# Altium PCB Board (Processo Seletivo).PcbDoc
Units mil, origin at the board's own origin, x right, y up, seen from the top; angles counter-clockwise.
Board outline 2952.76 x 2952.76 mil, 2 copper layers (Top Layer, Bottom Layer); 46 components, 40 nets, 179 pads, 0 vias.
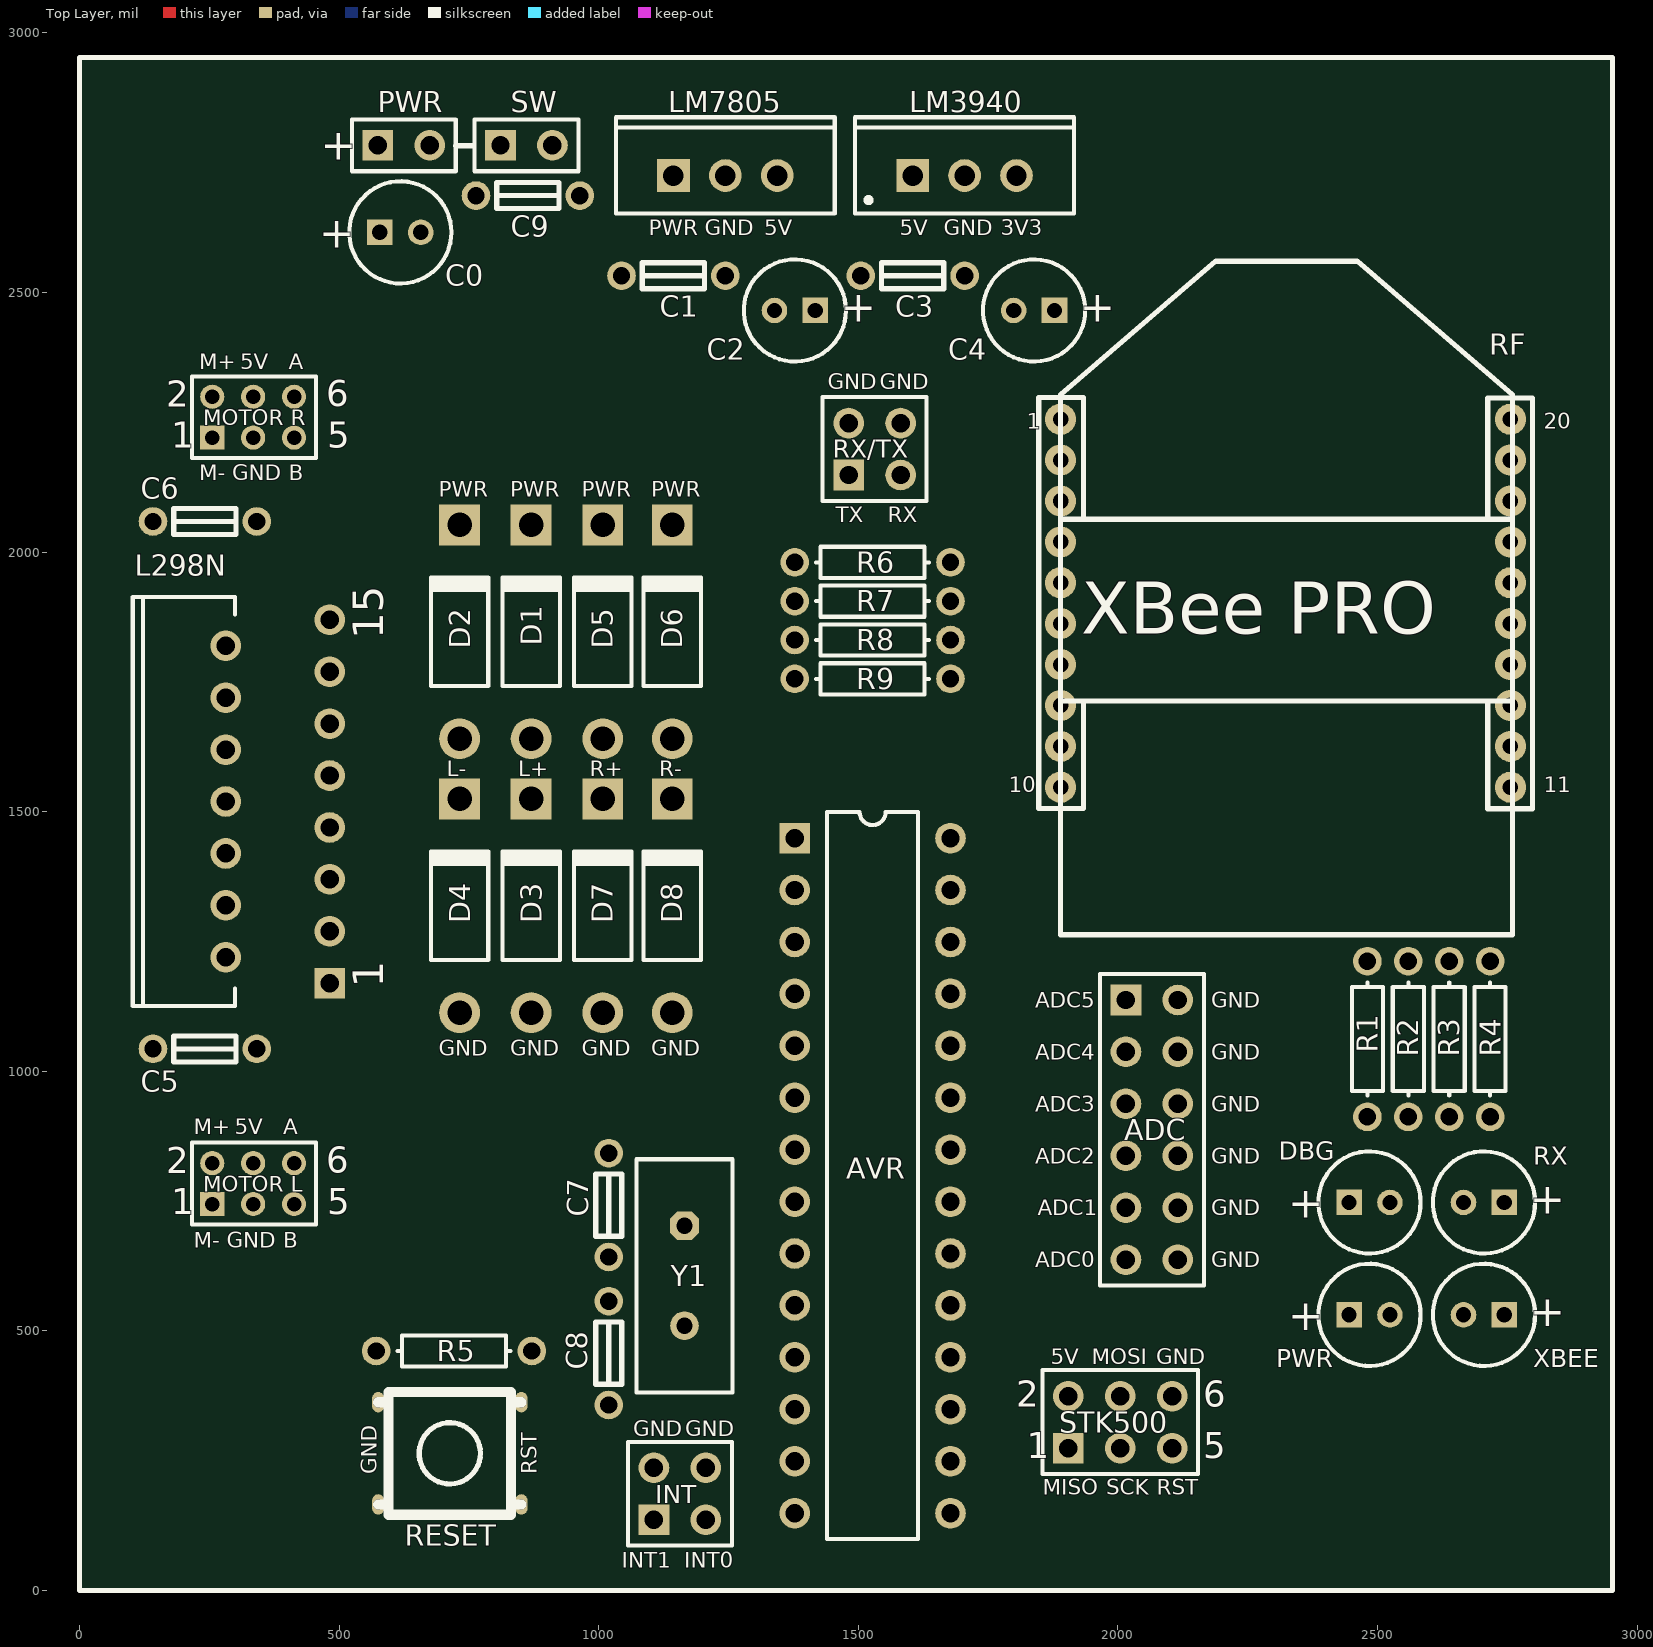
[diagram p0: Top Layer view]
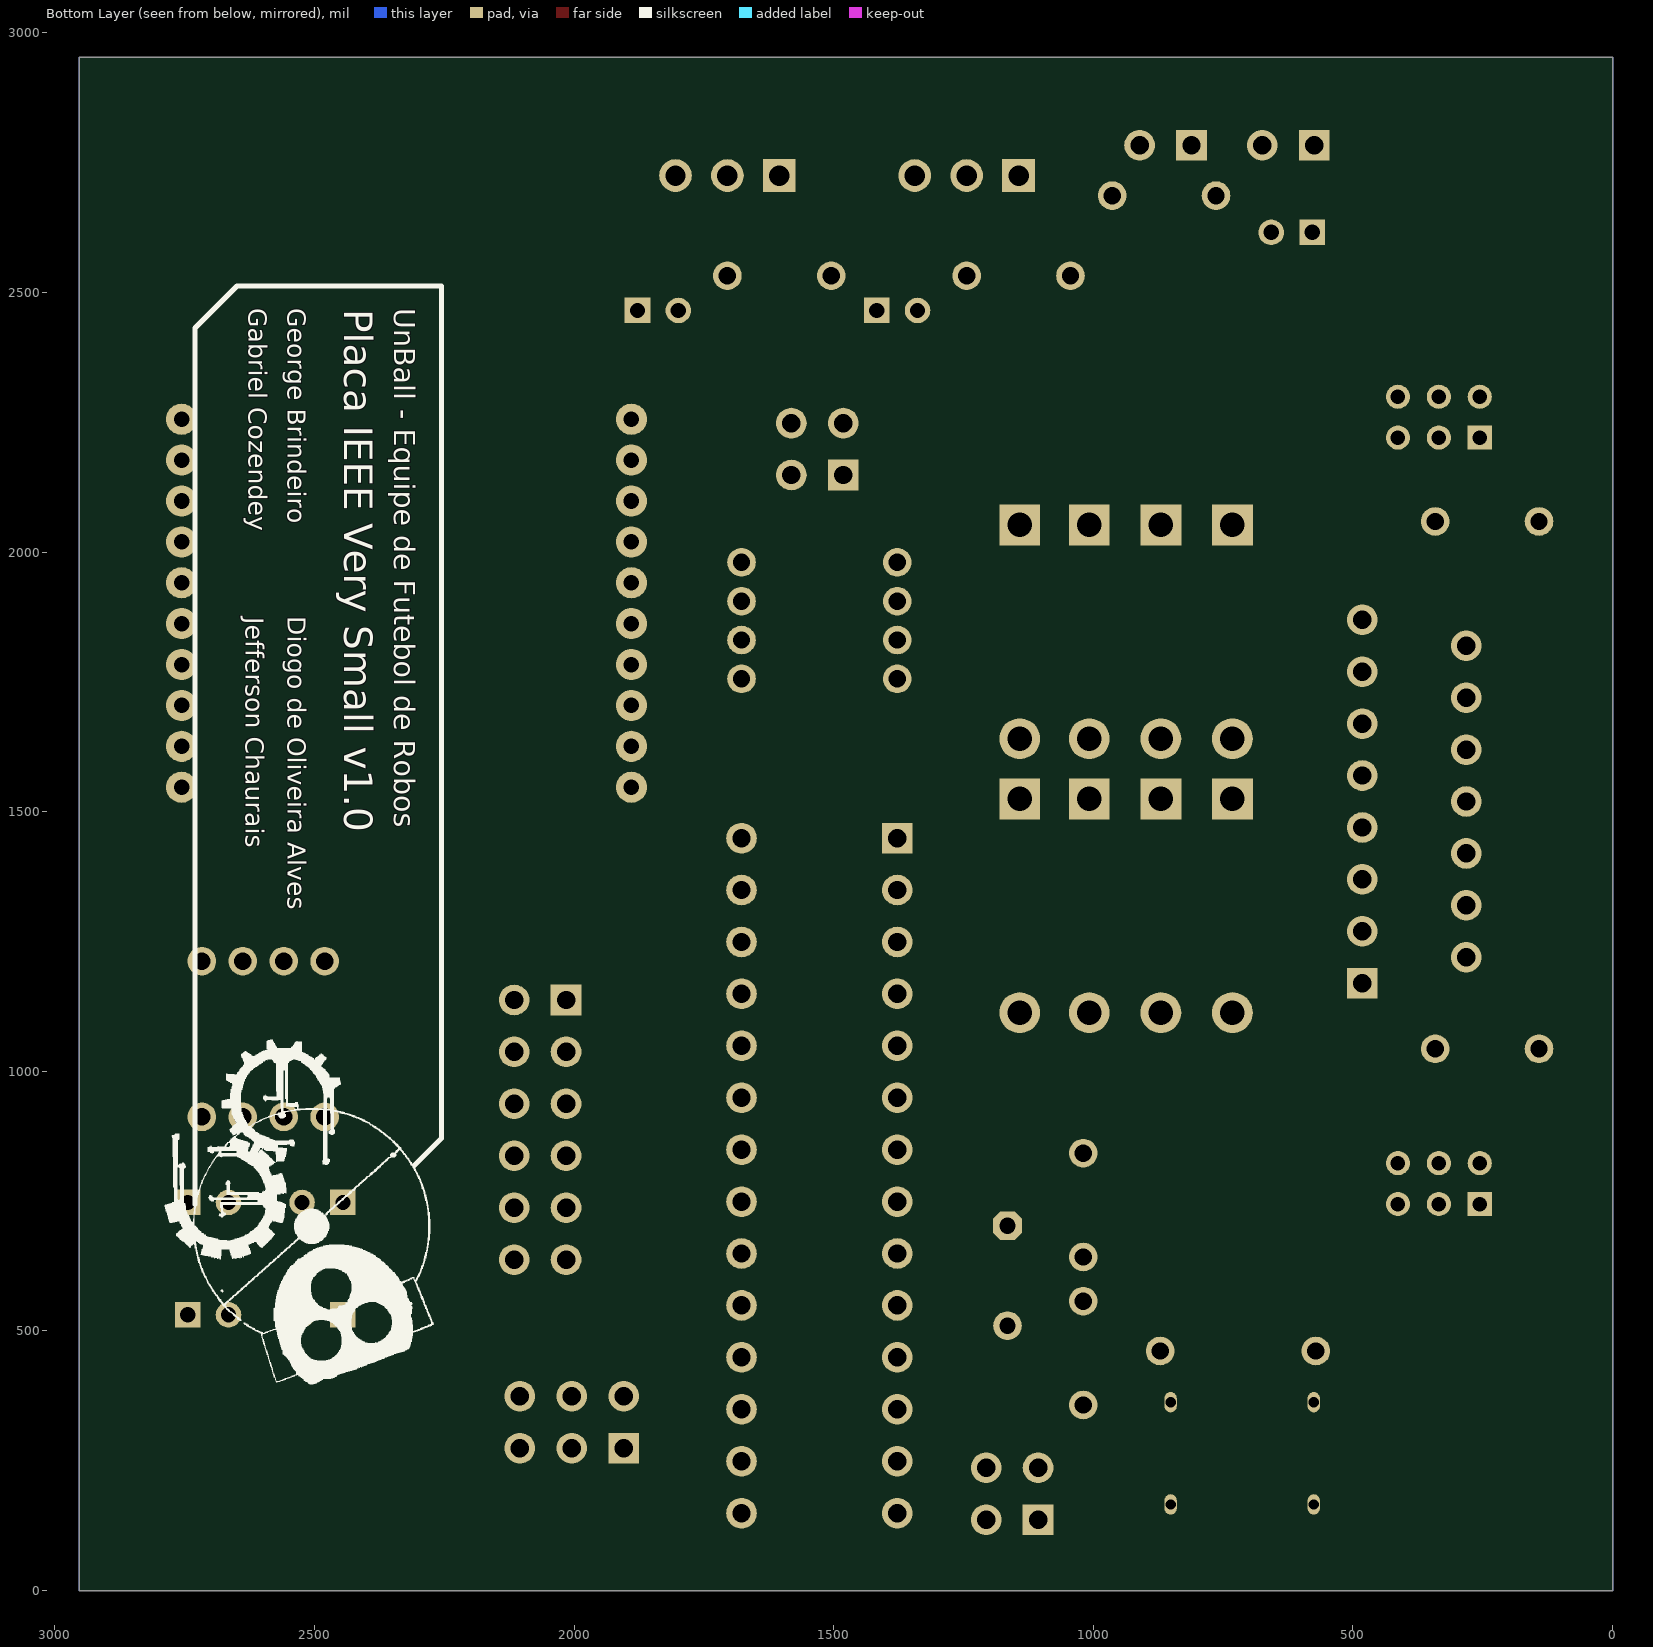
[diagram p1: Bottom Layer view, seen from below]

## Layer stack, top to bottom
Top Layer: signal copper 1.4
Dielectric: dielectric 12.6, FR-4, Dk 4.8
Bottom Layer: signal copper 1.4

## Board outline
0,0 0,2952.76 2952.76,2952.76 2952.76,0

## Design rules (kind name [scope] priority, off if disabled: settings)
Clearance [All] p1: gap=10
HoleSize [All] p1: absolutevalues=TRUE maxlimit=250 minlimit=1 maxpercent=80.000 minpercent=20.000
PolygonConnect [All] p1: connectstyle=Relief reliefconductorwidth=10 reliefentries=4 polygonreliefangle="90 Angle"
RoomDefinition Schematic [InComponentClass('Schematic')] p1: confinementstyle=ConfineIn formatcopy=TRUE lockcomponents=FALSE outline -790,-140 -930,-140 -930,3085 -790,3085
RoutingVias [All] p1: holewidth=28 width=50 viastyle="Through Hole" minholewidth=28 minwidth=50 maxholewidth=28 maxwidth=50
SilkToSilkClearance [All] p1 off: silktosilkclearance=10
SilkscreenOverComponentPads [All] p1 off: minsilkscreentomaskgap=10
SolderMaskExpansion [All] p1: expansion=4
Width [All] p1: maxlimit=15 minlimit=8 preferedwidth=10
25 further rules are at their usual default settings.

## Components (designator, comment, footprint, x,y, rotation, side; value= is the part's Value field where it differs from the comment)
ADC "Header 6X2" HDR2X6 2015.5,1137.5 r270 top
AVR "ATmega8-16PI" 28P3 1527.56,799.21 r270 top
C0 "Cap Pol1" B 618.11,2615.75 r0 top
C1 "Cap" C_NANO_HOLES 1044.09,2532.28 r0 top
C2 "Cap Pol1" B 1377.95,2465.35 r180 top
C3 "Cap" C_NANO_HOLES 1504.72,2532.28 r0 top
C4 "Cap Pol1" B 1838.58,2465.35 r180 top
C5 "Cap" C_NANO_HOLES 141.73,1043.31 r0 top
C6 "Cap" C_NANO_HOLES 141.73,2059.06 r0 top
C7 "Cap" C_NANO_HOLES 1019.49,842.6 r270 top
C8 "Cap" C_NANO_HOLES 1019.5,357.5 r90 top
C9 "Cap" C_NANO_HOLES 763.78,2686.61 r0 top
D1 "Diode 1N4007" DO-41 870.08,1846.46 r90 top
D2 "Diode 1N4007" DO-41 732.28,1846.46 r90 top
D3 "Diode 1N4007" DO-41 870.08,1318.9 r90 top
D4 "Diode 1N4007" DO-41 732.28,1318.9 r90 top
D5 "Diode 1N4007" DO-41 1007.88,1846.46 r90 top
D6 "Diode 1N4007" DO-41 1141.73,1846.46 r90 top
D7 "Diode 1N4007" DO-41 1007.88,1318.9 r90 top
D8 "Diode 1N4007" DO-41 1141.73,1318.9 r90 top
DBG "LED0" B 2484.51,747.6 r0 top (schematic designator DBG_LED)
INT "Header 2X2" HDR2X2 1106.5,136.5 r0 top
L298N "L298N" Multiwatt15V 381.89,1519.68 r90 top
LM3940 "LM3940IT-3.3" T03B 1704.72,2725.2 r0 top
LM7805 "µA7805CKC" KC03 1244.09,2725.2 r0 top
"MOTOR L" "Header 3X2 (2mm)" HDR2x3_2MM 255.91,744.5 r0 top
"MOTOR R" "Header 3X2 (2mm)" HDR2x3_2MM 255.91,2220.47 r0 top
PWR "LED0" B 2484.51,531.06 r0 top (schematic designator PWR_LED)
PWR "Header 2" HDR1X2 574.8,2783.46 r0 top
R1 "" AXIAL-0.3 2480.57,1062.24 r270 top
R2 "" AXIAL-0.3 2559.32,1062.24 r270 top
R3 "" AXIAL-0.3 2638.06,1062.24 r270 top
R4 "" AXIAL-0.3 2716.8,1062.24 r270 top
R5 "" AXIAL-0.3 721.5,461.5 r180 top
R6 "" AXIAL-0.3 1527.56,1980.31 r180 top
R7 "" AXIAL-0.3 1527.56,1905.51 r180 top
R8 "" AXIAL-0.3 1527.56,1830.71 r180 top
R9 "" AXIAL-0.3 1527.56,1755.91 r180 top
RESET "SW-PB" PUSHBUTTON 831.46,382.52 r180 top
RF "XBee Pro 60mW" XBEE_PRO 1889.76,1547.24 r0 top
RX "LED0" B 2704.98,747.6 r180 top (schematic designator RX_LED)
RX/TX "Header 2X2" HDR2X2 1481.5,2148.5 r0 top
STK500 "Header 3X2" HDR2X3 1904.5,274.5 r0 top
SW "Header 2" HDR1X2 811.02,2783.46 r0 top (schematic designator PWR_SW)
XBEE "LED0" B 2704.98,531.06 r180 top (schematic designator XBEE_LED)
Y1 "16MHZ" BCY-W2/E4.7 1165.35,606.3 r270 top

## Footprints (in the part's own frame and the unit in brackets; to place one, negate y for a bottom-side part, rotate by r counter-clockwise, add the part's x,y. Pads: shape width x height; smd on the part's side, far side on the other; paste and mask are expansions set on the pad)
28P3 [mm] "DIP; 28 Leads; Row Spacing 7.62 mm; Pitch 2.54 mm"
  rect 1.5x1.5 hole 0.9: 1(-16.51,-3.81)
  round 1.5 hole 0.9: 2(-13.97,-3.81) 3(-11.43,-3.81) 4(-8.89,-3.81) 5(-6.35,-3.81) 6(-3.81,-3.81) 7(-1.27,-3.81) 8(1.27,-3.81) 9(3.81,-3.81) 10(6.35,-3.81) 11(8.89,-3.81) 12(11.43,-3.81) 13(13.97,-3.81) 14(16.51,-3.81) 15(16.51,3.81) 16(13.97,3.81) 17(11.43,3.81) 18(8.89,3.81) 19(6.35,3.81) 20(3.81,3.81) 21(1.27,3.81) 22(-1.27,3.81) 23(-3.81,3.81) 24(-6.35,3.81) 25(-8.89,3.81) 26(-11.43,3.81) 27(-13.97,3.81) 28(-16.51,3.81)
  silkscreen extent -17.78,-2.23 17.78,2.22
AXIAL-0.3 [mm] "Axial Device, Thru-Hole; 2 Leads; 0.3 in Pin Spacing"
  round 1.4 hole 0.85: 1(-3.81,0) 2(3.81,0)
  silkscreen extent -2.77,-0.76 2.77,0.76
B [mm] "Capacitor, Electrolytic, Radial; Body 5 x 6.8 mm (Dia.xH typ); Pin Spacing 2 mm (typ)"
  rect 1.25x1.25 hole 0.75: 1(-1,0)
  round 1.25 hole 0.75: 2(1,0)
  silkscreen extent -2.5,-2.5 2.5,2.5
BCY-W2/E4.7 [mm] "Quartz Crystal, Thru-Hole; 2 Leads; Body 11.35 x 4.65 x 13.46 mm (LxWxH max)"
  oct 1.4x1.4 hole 0.8: 1(-2.44,0)
  round 1.4 hole 0.8: 2(2.44,0)
  silkscreen extent -5.7,-2.35 5.7,2.35
C_NANO_HOLES [mm] "C_NANO com furos maiores"
  round 1.4 hole 0.85: 1(0,0) 2(5.08,0)
  silkscreen extent 1.02,-0.64 4.06,0.63
DO-41 [mm] "Diode, Axial; Body 5.2 x 2.7 mm (LxDia. max), Lead Dia. 0.86 mm (max)"
  round 2 hole 1.2: 1(-5.23,0)
  rect 2x2 hole 1.2: 2(5.23,0)
  silkscreen extent -2.65,-1.4 2.75,1.4
HDR1X2 [mm] "Connector; Header; 2 Position"
  rect 1.5x1.5 hole 0.9: 1(0,0)
  round 1.5 hole 0.9: 2(2.54,0)
  silkscreen extent -1.27,-1.27 3.81,1.27
HDR2X2 [mm] "Connector; Header; 2x2 Position"
  rect 1.5x1.5 hole 0.9: 1(0,0)
  round 1.5 hole 0.9: 2(0,2.54) 3(2.54,0) 4(2.54,2.54)
  silkscreen extent -1.27,-1.27 3.81,3.81
HDR2X3 [mm] "Connector; Header; 3x2 Position"
  rect 1.5x1.5 hole 0.9: 1(0,0)
  round 1.5 hole 0.9: 2(0,2.54) 3(2.54,0) 4(2.54,2.54) 5(5.08,0) 6(5.08,2.54)
  silkscreen extent -1.27,-1.27 6.35,3.81
HDR2x3_2MM [mm] "Header 2x3 (2mm pitch)"
  rect 1.18x1.18 hole 0.71: 1(0,0)
  round 1.18 hole 0.71: 2(0,2) 3(2,0) 4(2,2) 5(4,0) 6(4,2)
  silkscreen extent -1,-1 5.08,3
HDR2X6 [mm] "Connector; Header; 6x2 Position"
  rect 1.5x1.5 hole 0.9: 1(0,0)
  round 1.5 hole 0.9: 2(0,2.54) 3(2.54,0) 4(2.54,2.54) 5(5.08,0) 6(5.08,2.54) 7(7.62,0) 8(7.62,2.54) 9(10.16,0) 10(10.16,2.54) 11(12.7,0) 12(12.7,2.54)
  silkscreen extent -1.27,-1.27 13.97,3.81
KC03 [mm] "TO, Thru-Hole, Vertical, Heatsink Mounted; 3 In-Line Leads; Pitch 2.54 mm"
  rect 1.6x1.6 hole 1: 1(-2.54,0)
  round 1.6 hole 1: 2(0,0) 3(2.54,0)
  silkscreen extent -5.35,-1.85 5.35,2.85
Multiwatt15V [mm] "TO, Thru-Hole, Vertical, Heatsink Mounted; 15 Bent Staggered Leads; Pitch 1.27 mm"
  rect 1.5x1.5 hole 0.9: 1(-8.89,-2.54)
  round 1.5 hole 0.9: 2(-7.62,2.54) 3(-6.35,-2.54) 4(-5.08,2.54) 5(-3.81,-2.54) 6(-2.54,2.54) 7(-1.27,-2.54) 8(0,2.54) 9(1.27,-2.54) 10(2.54,2.54) 11(3.81,-2.54) 12(5.08,2.54) 13(6.35,-2.54) 14(7.62,2.54) 15(8.89,-2.54)
  silkscreen extent -10,2.09 10,7.09
PUSHBUTTON [mm]
  oval 0.6x1 hole 0.5: 1(-0.5,5.5) 1(-0.5,0.5) 2(6.5,5.5) 2(6.5,0.5)
  silkscreen extent -0.5,0 6.5,6
T03B [mm] "TO, Thru-Hole, Vertical, Heatsink Mounted; 3 In-Line Leads; Pitch 2.54 mm"
  rect 1.6x1.6 hole 1: 1(-2.54,0)
  round 1.6 hole 1: 2(0,0) 3(2.54,0)
  silkscreen extent -5.35,-1.85 5.35,2.85, body extent -5.4,-1.9 5.4,2.9, height 19.4
XBEE_PRO [mil]
  round 60 hole 30: 1(0,708.66) 2(0,629.92) 3(0,551.18) 4(0,472.44) 5(0,393.7) 6(0,314.96) 7(0,236.22) 8(0,157.48) 9(0,78.74) 10(0,0) 11(866.14,0) 12(866.14,78.74) 13(866.14,157.48) 14(866.14,236.22) 15(866.14,314.96) 16(866.14,393.7) 17(866.14,472.44) 18(866.14,551.18) 19(866.14,629.92) 20(866.14,708.66)
  silkscreen extent 0,-284 870,1013

## Part data
ADC: "Header, 6-Pin, Dual row"
AVR: "8-Bit AVR Microcontroller with 8K Bytes of In-System Programmable Flash Memory"
C0 C2 C4: "Polarized Capacitor (Radial)"
C1 C3 C5 C6 C7 C8 C9: "Capacitor"
D1 D2 D3 D4 D5 D6 D7 D8: "1 Amp General Purpose Rectifier"
DBG PWR RX XBEE: "Typical INFRARED GaAs LED"
INT RX/TX: "Header, 2-Pin, Dual row"
L298N: "Dual Full Bridge Driver"
LM3940: "1A Low Dropout Regulator for 5V to 3.3V Conversion"
LM7805: "Positive-Voltage Regulator"
"MOTOR L" "MOTOR R": library part "Header 3X2", "Header, 3-Pin, Dual row"
PWR SW: "Header, 2-Pin"
R1 R2 R3 R4 R5 R6 R7 R8 R9: library part Res1, "Resistor"
RESET: "Switch"
RF: library part XBee
STK500: "Header, 3-Pin, Dual row"
Y1: library part ECS-120-32-1, "Crystal Oscillator"

## Nets (pads, with @x,y where several pads share a name; then routed paths per layer and width w, separated by ;. In a path a pad name is that pad's centre, name@x,y a point inside that pad or via, vN(x,y) a via of type N, cw(c..) or ccw(c..) an arc to the next point about the centre after c; other vN are vias at no path point)
3V3: C4.1 LM3940.3 RF.1
5V: "MOTOR L.4" "MOTOR R.4" AVR.7 AVR.20 AVR.21 C2.1 C3.1 C5.1 L298N.9 LM3940.1 LM7805.3 R1.1 R5.2 STK500.2
A_RX: 
A_TX: 
ADC0: ADC.11 AVR.23 L298N.1 R9.2
ADC1: ADC.9 AVR.24 L298N.15 R8.2
ADC2: ADC.7 AVR.25
ADC3: ADC.5 AVR.26
ADC4: ADC.3 AVR.27
ADC5: ADC.1 AVR.28 R2.1
AL: "MOTOR L.6" AVR.4
AR: "MOTOR R.6" AVR.5
BL: "MOTOR L.5" AVR.6
BR: "MOTOR R.5" AVR.11
CL: AVR.17 L298N.5 STK500.4
CR: AVR.18 L298N.10 STK500.1
DL: AVR.14 L298N.7
DR: AVR.19 L298N.12 STK500.3
ENL: AVR.15 L298N.6
ENR: AVR.16 L298N.11
GND: "MOTOR L.3" "MOTOR R.3" ADC.2 ADC.4 ADC.6 ADC.8 ADC.10 ADC.12 AVR.8 AVR.22 C5.2 C6.2 C7.2 C8.2 C9.2 D3.1 D4.1 D7.1 D8.1 DBG.2 INT.2 INT.4 L298N.8 PWR.2@2523.88,531.06 R7.2 R8.1 R9.1 RESET.2 RF.10 RX.2 RX/TX.2 RX/TX.4 STK500.6 SW.2 XBEE.2
INT0: AVR.12 INT.3
INT1: AVR.13 INT.1
L+: "MOTOR L.2" D1.1 D3.2 L298N.2
L-: "MOTOR L.1" D2.1 D4.2 L298N.3
NetDBG_1: DBG.1 R2.2
NetPWR_1: PWR.1@2445.14,531.06 R1.2
NetR3_2: R3.2 RX.1
NetR4_2: R4.2 XBEE.1
NetR6_1: R6.1 R7.1 RF.3
PWR: C0.1 C1.1 C6.1 D1.2 D2.2 D5.2 D6.2 L298N.4 LM7805.1 PWR.1@574.8,2783.46
PWR_SW: C0.2 C1.2 C2.2 C3.2 C4.2 C9.1 LM3940.2 LM7805.2 PWR.2@674.8,2783.46 SW.1
R+: "MOTOR R.2" D5.1 D7.2 L298N.13
R-: "MOTOR R.1" D6.1 D8.2 L298N.14
RST: AVR.1 R5.1 RESET.1 STK500.5
RXD: AVR.2 R3.1 RF.2 RX/TX.3
TXD: AVR.3 R6.2 RX/TX.1
XBEE: R4.1 RF.15
XTAL1: AVR.9 C7.1 Y1.1
XTAL2: AVR.10 C8.1 Y1.2
pads on no net: RF.4 RF.5 RF.6 RF.7 RF.8 RF.9 RF.11 RF.12 RF.13 RF.14 RF.16 RF.17 RF.18 RF.19 RF.20

## Polygon pours and split planes (outlines as drawn)
GND on Top Layer "Top Layer GND" (solid, remove dead copper, shelved, pour order 4): 0,0 2952.76,0 2952.76,2952.76 0,2952.76 0,0
GND on Bottom Layer "Bottom Layer GND" (solid, remove dead copper, shelved, pour order 6): 0,0 2952.76,0 2952.76,2952.76 0,2952.76 0,0

## Silkscreen, mask and mechanical layers (free items; w line width, h text height)
Top Overlay:
  lines w10: 724.8,2782.5 760.02,2782.5 ; 1933.5,1712.5 1933.5,1506.5 1847.5,1506.5 1847.5,2297.5 1933.5,2297.5 1933.5,2295.5 1933.5,2064.5 ; 2712.17,1505.65 2798.17,1505.65 2798.17,2296.65 2712.17,2296.65 2712.17,2063.24 ; 2712.17,1507.65 2712.17,1713.24 ; 0,0 0,2952.76 2952.76,2952.76 2952.76,0 0,0
  text "+" at 464.5,2755.5 h60
  text "PWR" at 1096.5,2610.5 h30
  text "GND" at 1204.11,2610.5 h30
  text "5V" at 1319.1,2610.5 h30
  text "5V" at 1579.73,2610.5 h30
  text "GND" at 1664.74,2610.5 h30
  text "3V3" at 1774.5,2610.5 h30
  text "M+" at 230.91,2352.5 h30
  text "5V" at 309.65,2352.5 h30
  text "A" at 403.39,2352.5 h30
  text "GND" at 1441.51,2313.5 h30
  text "GND" at 1541.51,2313.5 h30
  text "M-" at 230.91,2138.5 h30
  text "GND" at 294.66,2138.5 h30
  text "B" at 403.39,2138.5 h30
  text "PWR" at 692.3,2106.5 h30
  text "PWR" at 830.1,2106.5 h30
  text "PWR" at 967.89,2106.5 h30
  text "PWR" at 1101.75,2106.5 h30
  text "TX" at 1456.5,2057.5 h30
  text "RX" at 1556.5,2057.5 h30
  text "L-" at 707.29,1568.5 h30
  text "L+" at 845.09,1568.5 h30
  text "R+" at 982.88,1568.5 h30
  text "R-" at 1116.74,1568.5 h30
  text "ADC5" at 1840.5,1122.5 h30
  text "GND" at 2179.5,1122.5 h30
  text "GND" at 692.3,1030.5 h30
  text "GND" at 830.1,1030.5 h30
  text "GND" at 967.89,1030.5 h30
  text "GND" at 1101.75,1030.5 h30
  text "ADC4" at 1840.5,1022.5 h30
  text "GND" at 2179.5,1022.5 h30
  text "ADC3" at 1840.5,922.5 h30
  text "GND" at 2179.5,922.5 h30
  text "M+" at 220.5,878.5 h30
  text "5V" at 299.24,878.5 h30
  text "A" at 392.98,878.5 h30
  text "ADC2" at 1840.5,822.5 h30
  text "GND" at 2179.5,822.5 h30
  text "ADC1" at 1845.49,722.5 h30
  text "GND" at 2179.5,722.5 h30
  text "M-" at 220.5,660.5 h30
  text "GND" at 284.25,660.5 h30
  text "B" at 392.98,660.5 h30
  text "ADC0" at 1840.5,622.5 h30
  text "GND" at 2179.5,622.5 h30
  text "5V" at 1870.5,435.5 h30
  text "MOSI" at 1949.5,435.5 h30
  text "GND" at 2073.5,435.5 h30
  text "GND" at 1066.51,297.5 h30
  text "GND" at 1166.51,297.5 h30
  text "GND" at 572.5,224.42 h30 r90
  text "RST" at 880.5,224.42 h30 r90
  text "MISO" at 1855.5,184.5 h30
  text "SCK" at 1977.5,184.5 h30
  text "RST" at 2074.5,184.5 h30
  text "INT1" at 1044.5,44.5 h30
  text "INT0" at 1164.5,44.5 h30
Bottom Overlay:
  drawing of 9 lines, arcs and shapes, not listed
  text "UnBall - Equipe de Futebol de Robos" at 2346.5,2469.5 h40 r90
  text "George Brindeiro" at 2551.5,2469.5 h35 r90
  text "Gabriel Cozendey" at 2626.5,2469.5 h35 r90
  text "Placa IEEE Very Small v1.0" at 2442.5,2467.5 h55 r90
  text "Diogo de Oliveira Alves" at 2551.5,1876.5 h35 r90
  text "Jefferson Chaurais" at 2632.33,1874.5 h35 r90

## Text inside footprints (layer, text, board x,y; h text height)
C0: Top Overlay "+" at 461.61,2586.22 h59.06
C2: Top Overlay "+" at 1534.45,2494.88 h59.06 r180
C4: Top Overlay "+" at 1995.08,2494.88 h59.06 r180
DBG: Top Overlay "+" at 2328.02,718.07 h59.06
L298N: Top Overlay "1" at 585.24,1160.63 h59.06 r90; Top Overlay "15" at 585.24,1832.28 h59.06 r90
"MOTOR L": Top Overlay "1" at 177.17,724.81 h50; Top Overlay "2" at 167.32,803.55 h50; Top Overlay "6" at 475.91,804.5 h50; Top Overlay "5" at 477.17,724.81 h50
"MOTOR R": Top Overlay "1" at 177.17,2200.79 h50; Top Overlay "2" at 167.32,2279.53 h50; Top Overlay "6" at 475.91,2280.47 h50; Top Overlay "5" at 477.17,2200.79 h50
PWR: Top Overlay "+" at 2328.02,501.54 h59.06
RF: Top Overlay "XBee PRO" at 1929.76,1843.24 h100; Top Overlay "1" at 1824.75,2237.24 h30; Top Overlay "10" at 1789.76,1537.24 h30; Top Overlay "20" at 2819.76,2237.24 h30; Top Overlay "11" at 2819.76,1537.24 h30
RX: Top Overlay "+" at 2861.48,777.13 h59.06 r180
STK500: Top Overlay "1" at 1824.5,254.5 h50; Top Overlay "2" at 1804.5,354.5 h50; Top Overlay "5" at 2164.5,254.5 h50; Top Overlay "6" at 2164.5,354.5 h50
XBEE: Top Overlay "+" at 2861.48,560.59 h59.06 r180